# Altium PCB Flight_Controller.PcbDoc
Units mil, origin at the board's own origin, x right, y up, seen from the top; angles counter-clockwise.
Board outline 4500 x 2600 mil, 2 copper layers (Top Layer, Bottom Layer), stack 60.4 mil thick; 43 components, 33 nets, 186 pads, 0 vias.
Unrouted connection lines stored in the file: 100.
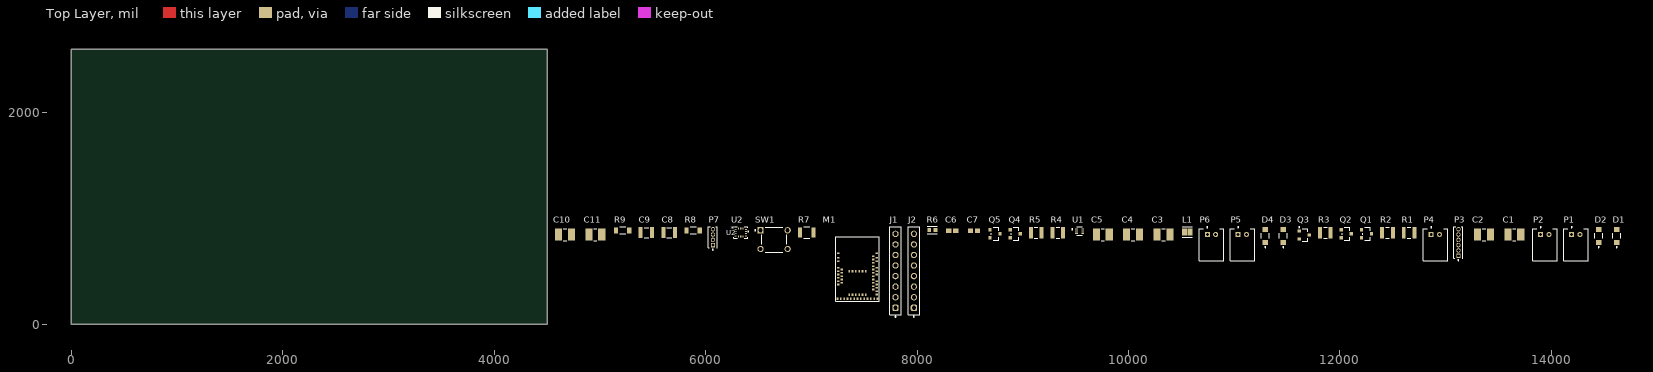
[diagram p0: Top Layer view]
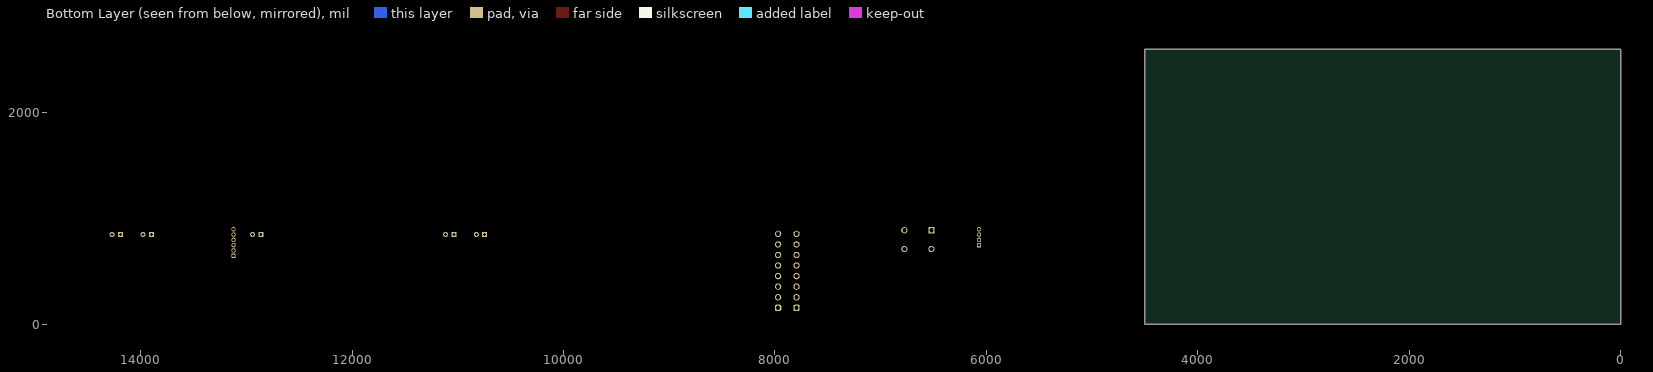
[diagram p1: Bottom Layer view, seen from below]

## Layer stack, top to bottom
Top Solder: solder mask 0.5, Solder Resist, Dk 3.3
Top Layer: signal copper 0.7
Dielectric1: core 59, FR-4, Dk 4.3
Bottom Layer: signal copper 0.7
Bottom Solder: solder mask 0.5, Solder Resist, Dk 3.3

## Board outline
0,0 4500,0 4500,2600 0,2600

## Design rules (kind name [scope] priority, off if disabled: settings)
Clearance [All] p1: gap=10 ignorepadtopadclearanceinfootprint=FALSE
DiffPairsRouting [All] p1: maxlimit=10 minlimit=10 mostfreqgap=10 toplayer_minwidth=10 toplayer_maxwidth=10 toplayer_prefwidth=10 bottomlayer_minwidth=10 bottomlayer_maxwidth=10 bottomlayer_prefwidth=10 maxuncoupledlength=500
HoleSize [All] p1: absolutevalues=TRUE maxlimit=300 minlimit=10 maxpercent=80.000 minpercent=20.000
MinimumAnnularRing [All] p1: minimumring=10
PasteMaskExpansion [All] p1: expansion=10
PlaneClearance [All] p1: clearance=15
PlaneConnect [All] p1: pad.planeconnectstyle=Relief pad.reliefexpansion=20 pad.reliefentries=4 pad.reliefconductorwidth=10 pad.reliefairgap=10 via.planeconnectstyle=Direct via.reliefexpansion=20 via.reliefentries=4 via.reliefconductorwidth=10 via.reliefairgap=10
PolygonConnect [All] p1: thpad.connectstyle=Relief thpad.reliefconductorwidth=10 thpad.reliefentries=4 thpad.polygonreliefangle="90 Angle" thpad.airgapwidth=10 smdpad.connectstyle=Relief smdpad.reliefconductorwidth=10 smdpad.reliefentries=4 smdpad.polygonreliefangle="90 Angle" smdpad.airgapwidth=10 via.connectstyle=Direct via.reliefconductorwidth=10 via.reliefentries=4 via.polygonreliefangle="90 Angle" via.airgapwidth=10
RoutingVias [All] p1: holewidth=10 width=20 viastyle="Through Hole" minholewidth=10 minwidth=20 maxholewidth=10 maxwidth=20
SMDNeckDown [All] p1: percent=100.000
SilkToSolderMaskClearance SilkscreenOverComponentPads [IsPad] p1: minsilkscreentomaskgap=10 clearancetoexposedcopper=TRUE
SolderMaskExpansion [All] p1: expansion=10 istentingtop=FALSE
SupplyNets "Schematic Supply Nets" [InNet('GND')] p1: voltage=0.000
Width [All] p1: maxlimit=10 minlimit=10 preferedwidth=10
24 further rules are at their usual default settings.

## Components (designator, comment, footprint, x,y, rotation, side; value= is the part's Value field where it differs from the comment)
C1 "10 uF" FP-1210-L_3_3_0_4-W_2_5_0-IPC_A 13649,848 r0 top
C2 "10 uF" FP-1210-L_3_3_0_4-W_2_5_0-IPC_A 13362,848 r0 top
C3 "10 uF" FP-1210-L_3_3_0_4-W_2_5_0-IPC_A 10330,848 r0 top
C4 "10 uF" FP-1210-L_3_3_0_4-W_2_5_0-IPC_A 10043,848 r0 top
C5 "10 uF" FP-1210-L_3_3_0_4-W_2_5_0-IPC_A 9757,848 r0 top
C6 "22 uF" CAPC1608X90X35ML15T15 8333,886 r0 top
C7 "22 uF" CAPC1608X90X35ML15T15 8538,886 r0 top
C8 "100 nF" CAPC1210(3225)100_L 5656,867 r0 top value=100nF
C9 "100 nF" CAPC1210(3225)100_L 5439,867 r0 top value=100nF
C10 "10 uF" FP-1210-L_3_3_0_4-W_2_5_0-IPC_A 4669,848 r0 top
C11 "10 uF" FP-1210-L_3_3_0_4-W_2_5_0-IPC_A 4956,848 r0 top
D1 "NRVBSS34FA" FP-425AB-MFG 14618,836 r90 top
D2 "NRVBSS34FA" FP-425AB-MFG 14448,836 r90 top
D3 "NRVBSS34FA" FP-425AB-MFG 11464,836 r90 top
D4 "NRVBSS34FA" FP-425AB-MFG 11294,836 r90 top
J1 "61300811821" 61300811821 7796,505 r90 top
J2 "61300811821" 61300811821 7970,505 r90 top
L1 "1 uH" FP-MLP2016M-IPC_C 10556,873 r0 top
M1 "MDBT50Q_52840" MDBT50Q 7436,829 r0 top
P1 "PH2.0 JST Male" JST-S2B-PH-K-S_V 14231,752 r0 top
P2 "PH2.0 JST Male" JST-S2B-PH-K-S_V 13938,752 r0 top
P3 "GRPB061VWVN-RC" SLIN-GRPB061VWVN-RC_V 13121,773 r90 top
P4 "PH2.0 JST Male" JST-S2B-PH-K-S_V 12903,752 r0 top
P5 "PH2.0 JST Male" JST-S2B-PH-K-S_V 11077,752 r0 top
P6 "PH2.0 JST Male" JST-S2B-PH-K-S_V 10785,752 r0 top
P7 "SWD Headers" SLIN-GRPB041VWVN-RC_V 6069,823 r90 top
Q1 "AO3400A" FP-SOT23-MFG 12251,855 r0 top
Q2 "AO3400A" FP-SOT23-MFG 12059,855 r0 top
Q3 "PMOS" AO-SOT-23-3L_V 11661,844 r0 top
Q4 "AO3400A" FP-SOT23-MFG 8928,855 r0 top
Q5 "AO3400A" FP-SOT23-MFG 8737,855 r0 top
R1 "10k" FP-CRGCQ1210-IPC_C 12654,866 r0 top value=10KΩ
R2 "10k" FP-CRGCQ1210-IPC_C 12450,866 r0 top value=10KΩ
R3 "10k" FP-CRGCQ1210-IPC_C 11862,866 r0 top value=10KΩ
R4 "10k" FP-CRGCQ1210-IPC_C 9331,866 r0 top value=10KΩ
R5 "10k" FP-CRGCQ1210-IPC_C 9127,866 r0 top value=10KΩ
R6 "732 k" FP-AC0603-IPC_B 8144,891 r0 top
R7 "100k" FP-AC1210-MFG 6956,866 r0 top value=100KΩ
R8 "820k" FP-AC1206-MFG 5881,887 r0 top value=820KΩ
R9 "820k" FP-AC1206-MFG 5214,887 r0 top value=820KΩ
SW1 "1825910-6" TECO-1825910-6_V 6648,800 r0 top
U1 "Boost Converter (5V)" FP-DRL0006A-MFG 9538,881 r0 top
U2 "BMI270" BMI270_BOS 6332,866 r0 top

## Footprints (in the part's own frame and the unit in brackets; to place one, negate y for a bottom-side part, rotate by r counter-clockwise, add the part's x,y. Pads: shape width x height; smd on the part's side, far side on the other; paste and mask are expansions set on the pad)
61300811821 [mm] "Socket Header, Pitch 2.54 mm, THT, Vertical, single row, 8p"
  rrect50% 1.52x1.52 hole 1.02: 1(-8.89,0)
  round 1.52 hole 1.02: 2(-6.35,0) 3(-3.81,0) 4(-1.27,0) 5(1.27,0) 6(3.81,0) 7(6.35,0) 8(8.89,0)
  silkscreen extent -11.14,-1.35 10.54,1.35, body extent -10.41,-1.25 10.41,1.25, height 8.55
AO-SOT-23-3L_V [mm] "SOT23, 3-Leads, Body 3.1x1.8mm, Pitch 0.95mm"
  rect 0.8x0.8 smd: 1(-1.2,0.95) 2(-1.2,-0.95) 3(1.2,0)
  silkscreen extent -1.32,-1.55 0.9,2.02, body extent -1.5,-1.55 1.5,1.55, height 1.25
BMI270_BOS [mil]
  rect 19x10 smd paste+0 mask+0: 1(-47.5,29.53) 2(-47.5,9.84) 3(-47.5,-9.84) 4(-47.5,-29.53) 8(47.5,-29.53) 9(47.5,-9.84) 10(47.5,9.84) 11(47.5,29.53)
  rect 10x19 smd paste+0 mask+0: 5(-19.68,-37.5) 6(0,-37.5) 7(19.68,-37.5) 12(19.68,37.5) 13(0,37.5) 14(-19.68,37.5)
  silkscreen extent -65,-55 77,55, body extent -60,-50 60,50, height 34
CAPC1210(3225)100_L [mm] "Chip Capacitor, Body 3.2x2.5mm, Height 1mm, IPC High Density"
  rect 0.95x2.6 smd: 1(-1.4,0) 2(1.4,0)
  silkscreen extent -0.55,-1.2 0.55,1.2, body extent -1.7,-1.35 1.7,1.35, height 1
CAPC1608X90X35ML15T15 [mm] "Chip Capacitor, 2-Leads, Body 1.60x0.81mm, IPC Low Density"
  rect 1.25x1.1 smd: 1(-0.85,0) 2(0.85,0)
  body extent -0.88,-0.48 0.87,0.48, height 0.9
FP-425AB-MFG [mm]
  rect 1.2x1.4 smd paste+0 mask+0: 1(-1.55,0) 2(1.55,0)
  silkscreen extent -2.82,-0.95 0.58,0.95, body extent -2.25,-1.05 2.25,1.05, height 0.25
FP-1210-L_3_3_0_4-W_2_5_0-IPC_A [mil]
  rect 67.04x114.34 smd paste+0 mask+0: 1(-61.03,0) 2(61.03,0)
  silkscreen extent -16,-57 16,57, body extent -114,-77 114,77, height 10
FP-AC0603-IPC_B [mil]
  rect 33.81x35.91 smd paste+0 mask+0: 1(-30.58,0) 2(30.58,0)
  silkscreen extent -47,-34 47,34, body extent -57,-28 57,28, height 10
FP-AC1206-MFG [mm]
  rect 1x1.5 smd paste+0 mask+0: 1(-1.6,0) 2(1.6,0)
  silkscreen extent -0.72,-0.85 0.72,0.85, body extent -2.2,-0.95 2.2,0.95, height 0.25
FP-AC1210-MFG [mm]
  rect 1x2.4 smd paste+0 mask+0: 1(-1.6,0) 2(1.6,0)
  silkscreen extent -0.72,-1.38 0.72,1.38, body extent -2.2,-1.48 2.2,1.48, height 0.25
FP-CRGCQ1210-IPC_C [mil]
  rect 37.72x106.54 smd paste+0 mask+0: 1(-50.28,0) 2(50.28,0)
  silkscreen extent -17,-51 17,51, body extent -73,-59 73,59, height 10
FP-DRL0006A-MFG [mm]
  rrect33% 0.67x0.3 smd paste+0 mask+0: 1(-0.74,0.5) 2(-0.74,0) 3(-0.74,-0.5) 4(0.74,-0.5) 5(0.74,0) 6(0.74,0.5)
  silkscreen extent -1.9,-1.05 0.65,1.05, body extent -1.17,-1.1 1.17,1.1, height 0.25
FP-MLP2016M-IPC_C [mil]
  rect 45.45x67.17 smd paste+0 mask+0: 1(-26.61,0) 2(26.61,0)
  silkscreen extent -49,-51 49,51, body extent -53,-39 53,39, height 10
FP-SOT23-MFG [mm]
  rect 0.8x0.8 smd paste+0 mask+0: 1(-1.2,0.95) 2(-1.2,-0.95) 3(1.2,0)
  silkscreen extent -0.9,-1.55 0.9,1.55, body extent -1.7,-1.78 1.7,1.78, height 0.25
JST-S2B-PH-K-S_V [mm] "THD, 2-Leads, Body 7.6x5.9mm, Pitch 2mm"
  rect 1.2x1.2 hole 0.7: 1(-1,2.45)
  round 1.2 hole 0.7: 2(1,2.45)
  silkscreen extent -2.95,-3.8 2.95,4.35, body extent -2.95,-3.8 2.95,3.8, height 4.8
MDBT50Q [mm]
  rect 0.6x0.4 smd mask+0.05: 1(-4.65,-4) 2(-4.65,-5.1) 3(-4.65,-5.9) 4(-4.65,-7.5) 5(-3.75,-7.9) 6(-4.65,-8.3) 7(-3.75,-8.7) 8(-4.65,-9.1) 9(-3.75,-9.5) 10(-4.65,-9.9) 11(-3.75,-10.3) 12(-4.65,-10.7) 13(-3.75,-11.1) 14(-4.65,-11.5) 34(4.65,-13.9) 35(4.65,-13.1) 36(3.75,-12.7) 37(4.65,-12.3) 38(3.75,-11.9) 39(4.65,-11.5) 40(3.75,-11.1) 41(4.65,-10.7) 42(3.75,-10.3) 43(3.75,-9.5) 44(4.65,-9.1) 45(3.75,-8.7) 46(4.65,-8.3) 47(3.75,-7.9) 48(4.65,-7.5) 49(3.75,-7.1) 50(3.75,-6.3) 51(4.65,-5.9) 52(3.75,-5.5) 53(4.65,-5.1) 54(3.75,-4.7) 55(4.65,-4)
  rect 0.4x0.6 smd mask+0.05: 15(-4.8,-14.9) 16(-4,-14.9) 17(-3.2,-14.9) 18(-2.4,-14.9) 19(-2,-14) 20(-1.6,-14.9) 21(-1.2,-14) 22(-0.8,-14.9) 23(-0.4,-14) 24(0,-14.9) 25(0.4,-14) 26(0.8,-14.9) 27(1.2,-14) 28(1.6,-14.9) 29(2,-14) 30(2.4,-14.9) 31(3.2,-14.9) 32(4,-14.9) 33(4.8,-14.9) 56(-2,-8.3) 57(-1.2,-8.3) 58(-0.4,-8.3) 59(0.4,-8.3) 60(1.2,-8.3) 61(2,-8.3)
  silkscreen extent -5.25,-15.5 5.25,0
SLIN-GRPB041VWVN-RC_V [mm] "Header, 4-Leads, Body 5.08x2.14mm, Pitch 1.27mm"
  rect 1.05x1.05 hole 0.7: 1(-1.905,0)
  round 1.05 hole 0.7: 2(-0.635,0) 3(0.635,0) 4(1.905,0)
  silkscreen extent -3.1,-1.07 2.54,1.07, body extent -2.54,-1.07 2.54,1.07, height 4
SLIN-GRPB061VWVN-RC_V [mm] "Header, 6-Leads, Body 7.62x2.14mm, Pitch 1.27mm"
  rect 1.05x1.05 hole 0.7: 1(-3.175,0)
  round 1.05 hole 0.7: 2(-1.905,0) 3(-0.635,0) 4(0.635,0) 5(1.905,0) 6(3.175,0)
  silkscreen extent -4.37,-1.07 3.81,1.07, body extent -3.81,-1.07 3.81,1.07, height 4
TECO-1825910-6_V [mm] "Switch, 4-Leads, Body 5.99x5.99mm"
  rect 1.5x1.5 hole 0.99: 1(-3.25,2.25)
  round 1.5 hole 0.99: 2(3.25,2.25) 3(-3.25,-2.25) 4(3.25,-2.25)
  silkscreen extent -4.67,-2.99 2.99,3, body extent -3,-2.99 2.99,3, height 5

## Part data
C1 C2 C3 C4 C5 C10 C11: library part CMP-1038-02198-3, "CAP CER 10UF 10V X7R 1210, 1210ZC106KAT2A", Capacitance=10uF, Case Code (Imperial)=1210, Case Code (Metric)=3225, Dielectric=X7R, Max Operating Temperature=125°C, Min Operating Temperature=-55°C, Package Quantity=1, Tolerance=10%, Voltage=10V, Case/Package=1210, Construction=Flat, Depth=2.5mm, Dissipation Factor=5%, Height=2.79mm, Lead Free="Lead Free", Length=3.2mm, Mount="Surface Mount", Packaging="Tape and Reel", Radiation Hardening=No, REACH SVHC="No SVHC", RoHS Compliant=Yes, Series=1210, Termination=SMD/SMT, Thickness=0.11inch, Voltage Rating=10V, Voltage Rating (DC)=10V, Width=0.098inch
C6 C7: library part CMP-2006-04205-1, "06034D226MAT2A", Manufacturer="AVX Interconnect / Elco", Part Number=06034D226MAT2A
C8 C9: library part CMP-1038-01633-2, "CAP 100nF 16V ±5% 1210 (3225 Metric) Thickness 1mm SMD", Case-EIA=1210, Case-Metric=3225, Rated Voltage="16 V", Tolerance=Â±5%, Max Thickness="1 mm", Technology=SMT
D1 D2 D3 D4: library part CMP-00278-103808874-1, "NRVBSS34FA Schottky Barrier Rectifier Diode 40V 3A 2-Pin SOD−123FL T/R", Capacitance=152pF, Forward Current=3A, Manufacturer Lifecycle Status=ACTIVE, Max Forward Surge Current (Ifsm)=80A, Max Junction Temperature (Tj)=125°C, Max Repetitive Reverse Voltage (Vrrm)=40V, Min Operating Temperature=-55°C, Peak Reverse Current=500µA, Height=1.43mm, Lifecycle Status=Production, Max Operating Temperature=125°C, NexarPartId=103808874, Reverse Voltage=40V, RoHS=Compliant
J1 J2: library part CMP-1502-01327-4, "Btb Conn, Rcpt, 8Pos, 1Row, 2.54Mm Rohs Compliant: Yes", Contact Resistance=20mΩ, Current Rating=3A, Operating Supply Voltage=250V, Gender=Female, Lead Pitch=2.54mm, Number of Pins=8, Orientation=Vertical, RoHS=Non-Compliant
L1: library part CMP-08253-000270-1, "Shielded Multilayer Inductor 1uH ±20% 1400mA 117mΩ SMD 0806, MLP2016S1R0MT0S1", Case Code (Imperial)=0806, Case Code (Metric)=2016, Current Rating=1.4A, DC Resistance (DCR)=117mR, Inductance=1uH, Max Operating Temperature=125°C, Min Operating Temperature=-40°C, Package Quantity=3000, Test Frequency=2MHz, Tolerance=20%, Case/Package=0806, Core Material=Ferrite, Height - Seated (Max)=0.039inch, Length=0.079inch, Mount="Surface Mount", Packaging="Tape and Reel", RoHS Compliant=Yes, Shielding=Shielded, Width=0.063inch
M1: "MDBT50Q(52840)"
P1 P2 P4 P5 P6: library part CMP-002-00030-2, "Male Header, Pitch 2 mm, 1 x 2 Position, Height 4.8 mm, Tail Length 3.4 mm, -25 to 85 degC, RoHS, Bulk, S2B-PH-K-S(LF)(SN), LiPo header", Case/Package=S2B-PH-K-S, Manufacturer="Japan Solderless Terminals", Max Operating Temperature=85°C, Min Operating Temperature=-25°C, Package Description="Male Header, Pitch 2 mm, 1 x 2 Position, Height 4.8 mm, Tail Length 3.4 mm", Connector Type=Header, Datasheet URL=http://www.jst-mfg.com/product/pdf/eng/ePH.pdf, Datasheet Version=Dec-12, Gender=Male, Mounting Technology=SM, Package Reference=S2B-PH-K-S, RoHS Compliant=Unknown
P3: library part CMP-2000-06374-1, "Male Header, Pitch 1.27 mm, 1 x 6 Position, Height 4 mm, Tail Length 2.3 mm, -40 to 105 degC, RoHS, Bulk", Manufacturer=Sullins, Package Description="Male Header, Pitch 1.27 mm, 1 x 6 Position, Height 4 mm, Tail Length 2.3 mm", Standard Package=1, Catalog Drawings=S9014ESeriesTop, Category=Connectors,Interconnects, Connector Type=Header,Unshrouded, Contact Finish=Gold, Contact Finish Thickness=Flash, Contact Mating Length="0.118\"(3.00mm)", Contact Type=MalePin, Datasheet URL=http://www.sullinscorp.com/drawings/71_GRPB___1VWVN-RC,_10957-C.pdf, Datasheet Version="Rev. C, 12/2008", Dynamic Catalog=GRPB, Family=RectangularConnectors-Headers,MalePins, Manufacturer URL=http://www.sullinscorp.com/, Mating Products="S9010E-06-ND / -CONNHEADER.050\"6POSR/APCB / S9008E-06-ND / -CONNHEADER.050\"6POSPCBGOLD / S9005E-06-ND / -CONNHEADER.050\"6POSSMDGOLD", Mounting Technology=ThroughHole, Mounting Type=ThroughHole, Number of Positions=6, Number of Positions Loaded=All, Number of Rows=1, Other Names=S9014E-06, Package Reference=GRPB061VWVN-RC, Packaging=Bulk, Pitch="0.050\"(1.27mm)", Termination=Solder
P7: library part CMP-2000-06373-1, "Male Header, Pitch 1.27 mm, 1 x 4 Position, Height 4 mm, Tail Length 2.3 mm, -40 to 105 degC, RoHS, Bulk, GRPB041VWVN-RC", Manufacturer=Sullins, Package Description="Male Header, Pitch 1.27 mm, 1 x 4 Position, Height 4 mm, Tail Length 2.3 mm", Package Reference=GRPB041VWVN-RC, Standard Package=1, Catalog Drawings=S9014ESeriesTop, Category=Connectors,Interconnects, Connector Type=Header,Unshrouded, Contact Finish=Gold, Contact Finish Thickness=Flash, Contact Mating Length="0.118\"(3.00mm)", Contact Type=MalePin, Datasheet URL=http://www.sullinscorp.com/drawings/71_GRPB___1VWVN-RC,_10957-C.pdf, Datasheet Version="Rev. C, 12/2008", Dynamic Catalog=GRPB, Family=RectangularConnectors-Headers,MalePins, Manufacturer URL=http://www.sullinscorp.com/, Mating Products="S9010E-04-ND / -CONNHEADER.050\"4POSR/APCB / S9008E-04-ND / -CONNHEADER.050\"4POSPCBGOLD / S9005E-04-ND / -CONNHEADER.050\"4POSSMDGOLD", Mounting Technology=ThroughHole, Mounting Type=ThroughHole, Number of Positions=4, Number of Positions Loaded=All, Number of Rows=1, Other Names=S9014E-04, Packaging=Bulk, Pitch="0.050\"(1.27mm)", Termination=Solder
Q1 Q2 Q4 Q5: library part CMP-83955-000006-1, "MOSFET N-CH 30V 5.7A SOT23", Case/Package=SOT-23, Continuous Drain Current (ID)=5.7A, Drain to Source Voltage (Vdss)=30V, Gate to Source Voltage (Vgs)=12V, Input Capacitance=630pF, Max Operating Temperature=150°C, Max Power Dissipation=1.4W, Min Operating Temperature=-55°C, Lead Free="Lead Free", Mount="Surface Mount", Number of Elements=1, Number of Pins=3, Packaging="Tape and Reel", Power Dissipation=1.4W, Radiation Hardening=No, Rds On Max=26.5mR
Q3: library part CMP-2000-05778-1, "P-Channel MOSFET, 30 V, 4 A, -55 to 150 degC, 3-Pin SOT-23-3L, RoHS, Tape and Reel, AO3401A", Continuous Drain Current=4A, Drain-Source On-Volt=30V, Frequency (Max)=NotRequiredMHz, Gate-Source Voltage (Max)=?12V, Manufacturer="Alpha and Omega", Operating Temp Range=-55Cto150C, Operating Temperature Classification=Military, Output Power (Max)=NotRequiredW, Package Description="3-Pin Small Outline Transistor, Body 2.95 x 1.6 mm, Pitch 0.95 mm", Package Reference=SOT-23-3L, Package Type=SOT-23, Power Dissipation=1.4W, Power Gain=NotRequireddB, Channel Mode=Enhancement, Datasheet URL=http://www.aosmd.com/res/data_sheets/AO3401A.pdf, Datasheet Version="Rev. 3, 03/2011", Drain Current (Max)=4A, Drain Efficiency=NotRequired%, Drain-Source On-Res=0.044ohm, Manufacturer URL=http://www.aosmd.com/, Mounting=SurfaceMount, Mounting Technology=SurfaceMount, Noise Figure=NotRequireddB, Number of  Elements=1, Package URL=http://www.aosmd.com/res/packaging_information/SOT-23-3L.pdf, Pin Count=3, Polarity=P, Rad Hardened=No, Type=PowerMOSFET
R1 R2 R3 R4 R5: library part CMP-03211-008962-1, "CRGCQ1210 10KΩ 0.5W ±100ppm/°C 5% 200V", Ambient Temperature Range High=+70°C, Manufacturer="TE Connectivity", Manufacturer Part Number=CRGCQ1210J10K, Package=CRGCQ1210, Power Rating=0.5W, Resistance=10KΩ, Temperature="-55°C to +155°C", Temperature Coefficient=±100ppm/°C, Temperature Range High=+155°C, Temperature Range Low=-55°C, Tolerance=0.05, Voltage Rating=200V, Automotive=Yes, Automotive Grade="Grade 914", Category=Res, ComponentLink2Description=Datasheet, ComponentLink2URL=https://www.te.com/commerce/DocumentDelivery/DDEController?Action=showdoc&DocId=Data+Sheet%7F1773204-3%7F1%7Fpdf%7FEnglish%7FENG_DS_1773204-3_1.pdf%7F4-2176347-923, Composition="Thick Film", Device Class L1="Passive Components", Device Class L2=Resistors, Device Class L3="Chip SMD Resistors", Height=0.65mm, Ipc Land Pattern Name=RESC310260X55, Lead Free=Yes, Octopart=https://octopart.com/crgcq1210j10k-te+connectivity-91018409, RoHS=TRUE, Series=CRGCQ
R6: library part CMP-03412-004424-2, "RES 732KΩ 1.00% 0.1W 0603, AC0603FR-07732KL", Case Code (Imperial)=0603, Case Code (Metric)=1608, Max Operating Temperature=155°C, Max Power Dissipation=100mW, Min Operating Temperature=-55°C, Resistance=732kR, Resistor Type="Thick Film", Temperature Coefficient=100ppm/°C, Tolerance=1%, Voltage Rating=50V, Case/Package=0603, Features="Moisture Resistant", Height=0.022inch, Length=0.063inch, Number of Terminations=2, Packaging="Tape and Reel", Power Rating=100mW, RoHS Compliant=Yes, Series=AC, Termination=SMD/SMT, Width=0.8mm
R7: library part CMP-03412-028991-1, "RES SMD 100K OHM 5% 1/2W 1210, AC1210JR-07100KL", Manufacturer=Yageo, Manufacturer Part Number=AC1210JR-07100KL, Package=AC1210, Power Rating=0.5W, Resistance=100KΩ, Temperature="-55°C to +155°C", Temperature Range High=+155°C, Temperature Range Low=-55°C, Tolerance=0.05, Voltage Rating=200V, Automotive=Yes, Automotive Grade="Grade 0", Category=Res, ComponentLink2Description=Datasheet, ComponentLink2URL=http://www.yageo.com/NewPortal/yageodocoutput?fileName=/pdf/R-Chip/PYu-AC_51_RoHS_L_6.pdf, Composition="Thick Film", Device Class L1="Passive Components", Device Class L2=Resistors, Device Class L3="Chip SMD Resistors", Digikey Description="RES SMD 100K OHM 5% 1/2W 1210", Footprint Url=http://www.yageo.com/exep/pages/download/literatures/PYu-R_Mount_9.pdf, Height=0.65mm, Ipc Land Pattern Name=RESC310260X55, Lead Free=Yes, Octopart=https://octopart.com/ac1210jr-07100kl-yageo-71368869, RoHS=TRUE, Series=AC
R8 R9: library part CMP-03412-027672-1, "RES SMD 820K OHM 1% 1/4W 1206, AC1206FR-07820KL", Manufacturer=Yageo, Manufacturer Part Number=AC1206FR-07820KL, Package=AC1206, Power Rating=0.25W, Resistance=820KΩ, Temperature="-55°C to +155°C", Temperature Range High=+155°C, Temperature Range Low=-55°C, Tolerance=0.01, Voltage Rating=200V, Automotive=Yes, Automotive Grade="Grade 0", Category=Res, ComponentLink2Description=Datasheet, ComponentLink2URL=http://www.yageo.com/NewPortal/yageodocoutput?fileName=/pdf/R-Chip/PYu-AC_51_RoHS_L_6.pdf, Composition="Thick Film", Device Class L1="Passive Components", Device Class L2=Resistors, Device Class L3="Chip SMD Resistors", Digikey Description="RES SMD 820K OHM 1% 1/4W 1206", Footprint Url=http://www.yageo.com/exep/pages/download/literatures/PYu-R_Mount_10.pdf, Height=0.65mm, Ipc Land Pattern Name=RESC310160X55, Lead Free=Yes, Octopart=https://octopart.com/ac1206fr-07820kl-yageo-71368214, RoHS=TRUE, Series=AC
SW1: library part CMP-1684-00021-1, "Tact Switch, SPST-NO, 0.05 A, -35 to 85 degC, 4-Pin THD, RoHS, Bulk", Actuator Color=Black, Contact Rating @ Voltage=0.05A@24VDC, Dielectric Strength=500VAC, Manufacturer="TE Connectivity", Maximum AC Voltage Rating=N/A, Maximum Contact Resistance=100mOhm, Maximum DC Voltage Rating=24V, Minimum Insulation Resistance=100MOhm, Operating Temperature=-35to85C, Package Description="4-Pin Through Hole Device, Body 5.99 x 5.99 mm, Pitch 6.5 mm", Package Reference=THD, Actuator Length=1.4mm, Actuator Material=PolybutyleneTerephthalate, Actuator Style=RoundButton, Base Material=N/A, Body Orientation=Straight, Bushing Type=Unthreaded, Contact Material=CopperAlloy, Contact Plating=Silver, Datasheet URL=http://www.te.com/commerce/DocumentDelivery/DDEController?Action=showdoc&DocId=Customer+Drawing%7F1825910%7FC9%7Fpdf%7FEnglish%7FENG_CD_1825910_C9.pdf%7F1825910-6, Datasheet Version="Rev. C9", Dimension=5.99x5mm, Electrical Life=100000Cycles, Family=1825910, Function=MomentaryContact, Housing Material=N/A, Illumination=N/R, Manufacturer URL=http://www.te.com, Mechanical Life=100000Cycles, Mounting=ThroughHole, Packaging=N/A, Part No=1825910-6, Pole Throw Configuration=SPST, Product Weight=N/A, RoHS=Yes, Seal Description=N/A, Seal Location=N/A, Switch Configuration=OFF(ON), Terminal Type=PCPins, Thread Size=N/R
U1: library part CMP-04918-000638-1, "FINISH GOODS FOR TPS61023,TPS61023DRLR"
U2: "Description", Manufacturer_Name="Bosch Sensortec", Copyright="Copyright (C) 2025 Ultra Librarian. All rights reserved.", Manufacturer_Part_Number=BMI270, RefDes=RefDes, Type=Type

## Nets (pads, with @x,y where several pads share a name; then routed paths per layer and width w, separated by ;. In a path a pad name is that pad's centre, name@x,y a point inside that pad or via, vN(x,y) a via of type N, cw(c..) or ccw(c..) an arc to the next point about the centre after c; other vN are vias at no path point)
3V3: J2.1
5V: C6.1 C7.1 J1.1 R6.1 U1.6
CSB: M1.46 U2.12
EN: M1.22 U1.2
GND: C1.2 C2.2 C3.2 C4.2 C5.2 C6.2 C7.2 C8.1 C9.1 C10.2 C11.2 J1.2 J2.4 J2.8 M1.1 M1.2 M1.33 M1.55 P4.1 P7.2 Q1.2 Q2.2 Q4.2 Q5.2 R1.2 R2.2 R3.2 R4.2 R5.2 R7.2 R9.2 SW1.3 U1.4 U2.6 U2.7
GPIO0: J2.3 SW1.1
GPIO2: J1.8
GPIO4: J1.7
GPIO12: J1.3 M1.45
GPIO13: J1.4
GPIO14: J1.6
GPIO15: J1.5
GPIO16: J2.2
INT1: M1.41 U2.4
MISO: M1.44 U2.1
MOSI: M1.42 U2.14
MOT+: C1.1 C2.1 C3.1 C4.1 C5.1 C11.1 D1.1 D2.1 D3.1 D4.1 L1.1 M1.30 P1.2 P2.2 P5.2 P6.2 Q3.3 R8.1 U1.3
MOT-: D1.2 D2.2 D3.2 D4.2 P1.1 P2.1 P5.1 P6.1 Q1.3 Q2.3 Q4.3 Q5.3
NetL1_2: L1.2 U1.5
NetM1_11: M1.11 R8.2 R9.1
NetQ3_1: Q3.1 R3.1
NetR6_2: R6.2 R7.1 U1.1
PWM1: M1.37 Q1.1 R1.1
PWM2: M1.36 Q2.1 R2.1
PWM3: M1.38 Q5.1 R5.1
PWM4: M1.39 Q4.1 R4.1
RX: J2.6 M1.49
SCK: M1.43 U2.13
SWDCLK: M1.53 P7.4
SWDIO: M1.51 P7.3
TX: J2.7 M1.48
VBAT: P4.2 Q3.2
VDD: C8.2 C9.2 C10.1 M1.28 P7.1 U2.5 U2.8
pads on no net: J2.5 M1.3 M1.4 M1.5 M1.6 M1.7 M1.8 M1.9 M1.10 M1.12 M1.13 M1.14 M1.15 M1.16 M1.17 M1.18 M1.19 M1.20 M1.21 M1.23 M1.24 M1.25 M1.26 M1.27 M1.29 M1.31 M1.32 M1.34 M1.35 M1.40 M1.47 M1.50 M1.52 M1.54 M1.56 M1.57 M1.58 M1.59 M1.60 M1.61 P3.1 P3.2 P3.3 P3.4 P3.5 P3.6 SW1.2 SW1.4 U2.2 U2.3 U2.9 U2.10 U2.11

## Text inside footprints (layer, text, board x,y; h text height)
M1: Route Tool Path "No ground pad" at 7325.71,759.12 h17.72; Route Tool Path "as wide as possible" at 7116,589 h17.72 r90; Route Tool Path "as wide as possible" at 7275.57,901.83 h17.72; Dimensions "Toplayer no ground pad" at 7302.14,583.92 h11.81
U2: Top Assembly "*" at 6281.5,880.37 h50; Top Overlay "*" at 6237.5,880.37 h50